# Altium PCB PCB1.PcbDoc
Units mm, origin at the board's own origin, x right, y up, seen from the top; angles counter-clockwise.
Board outline 51.75 x 40 mm, 4 copper layers (Component Side, Ground Plane, Power Plane, Solder Side), stack 0.844 mm thick; 26 components, 70 nets, 254 pads, 63 vias.
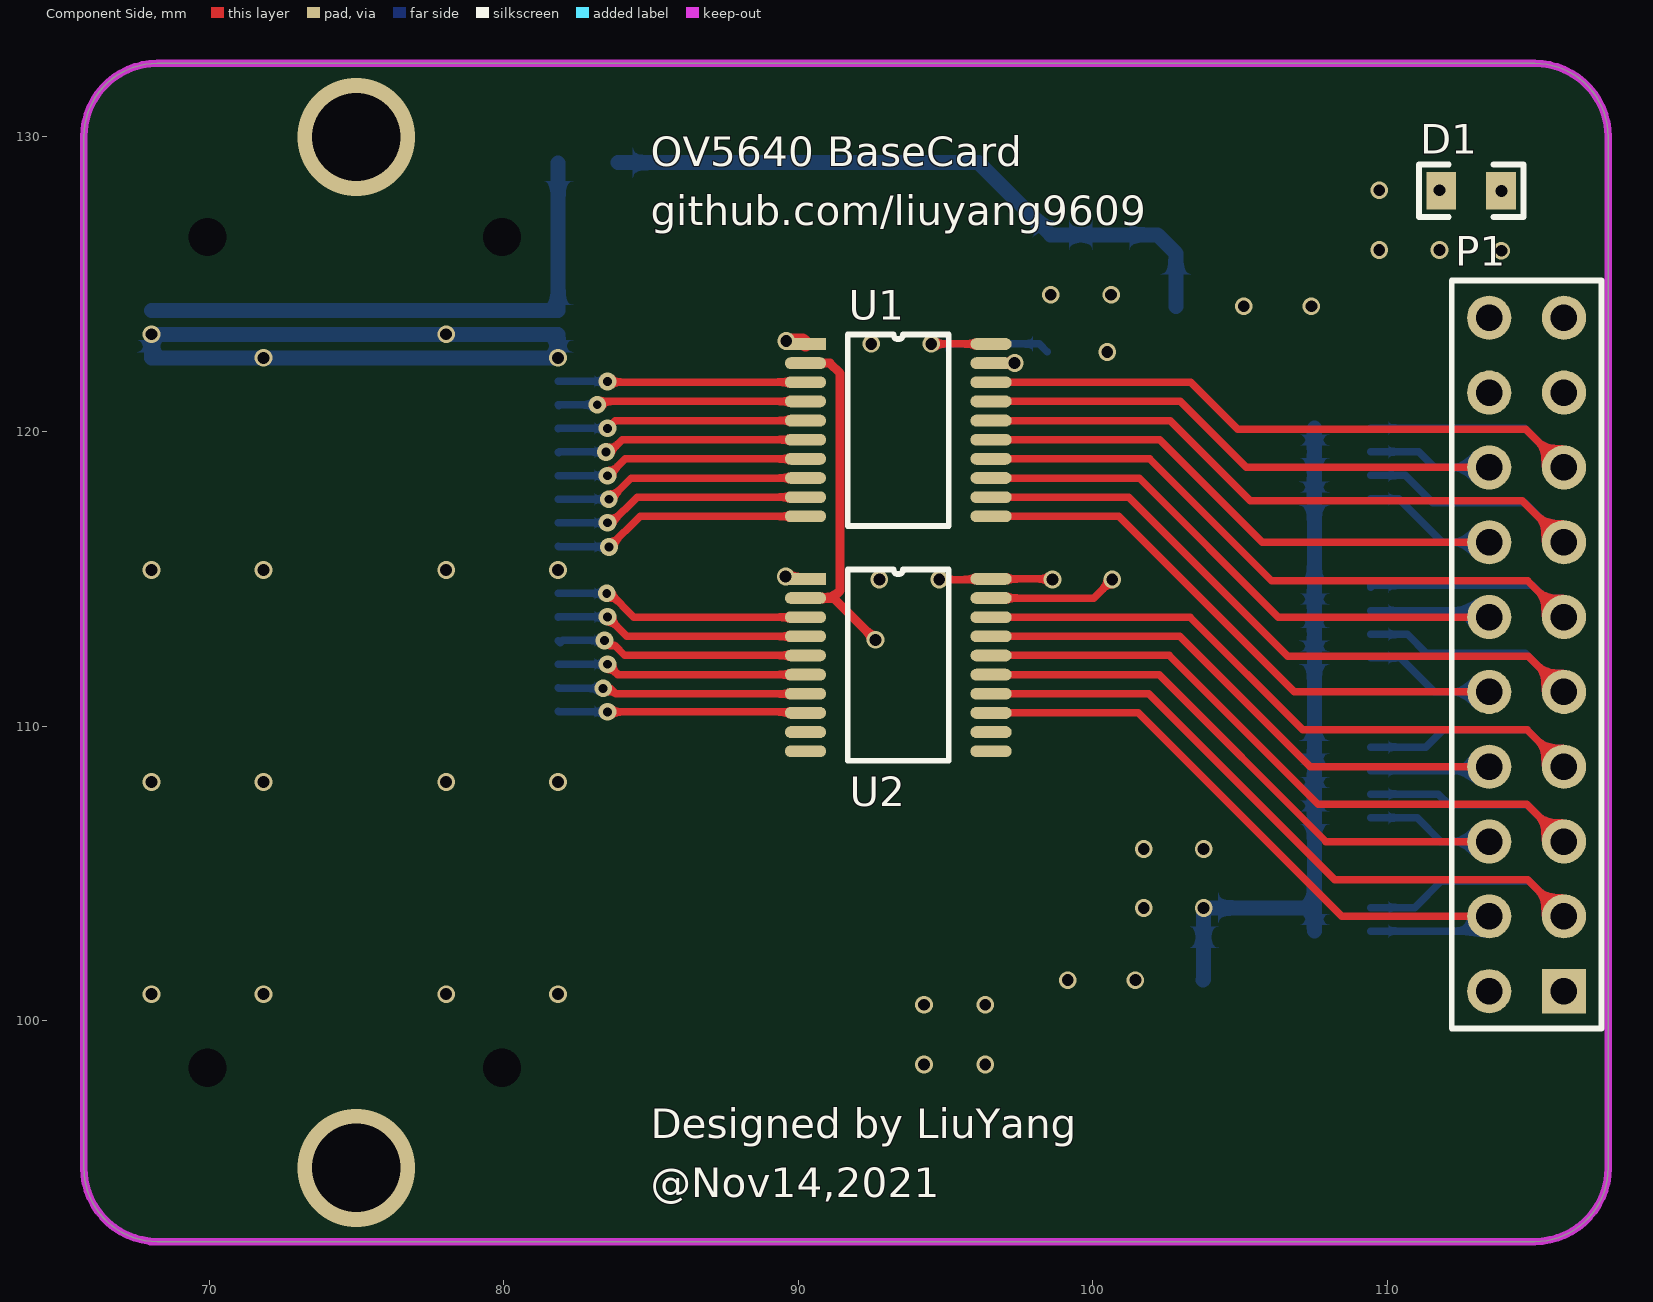
[diagram p0: Component Side view]
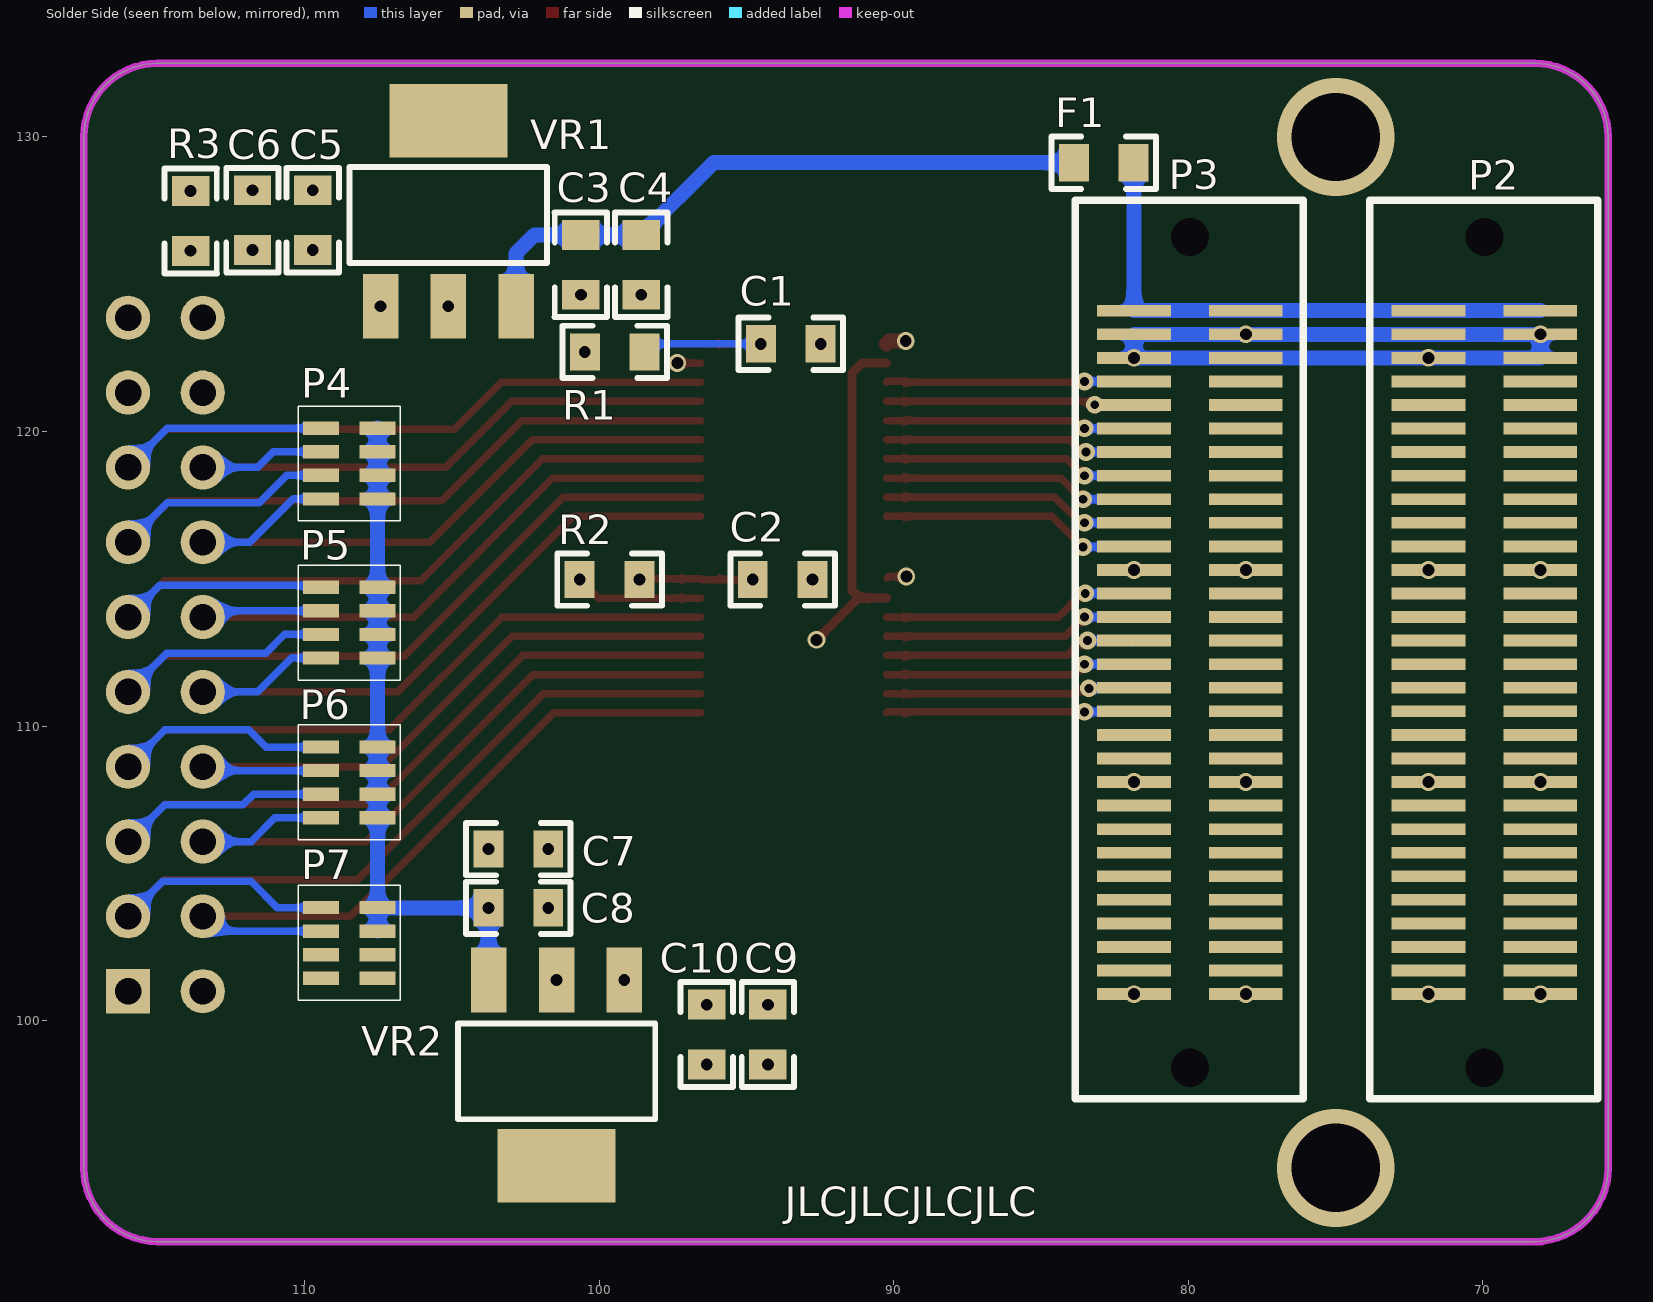
[diagram p1: Solder Side view, seen from below]
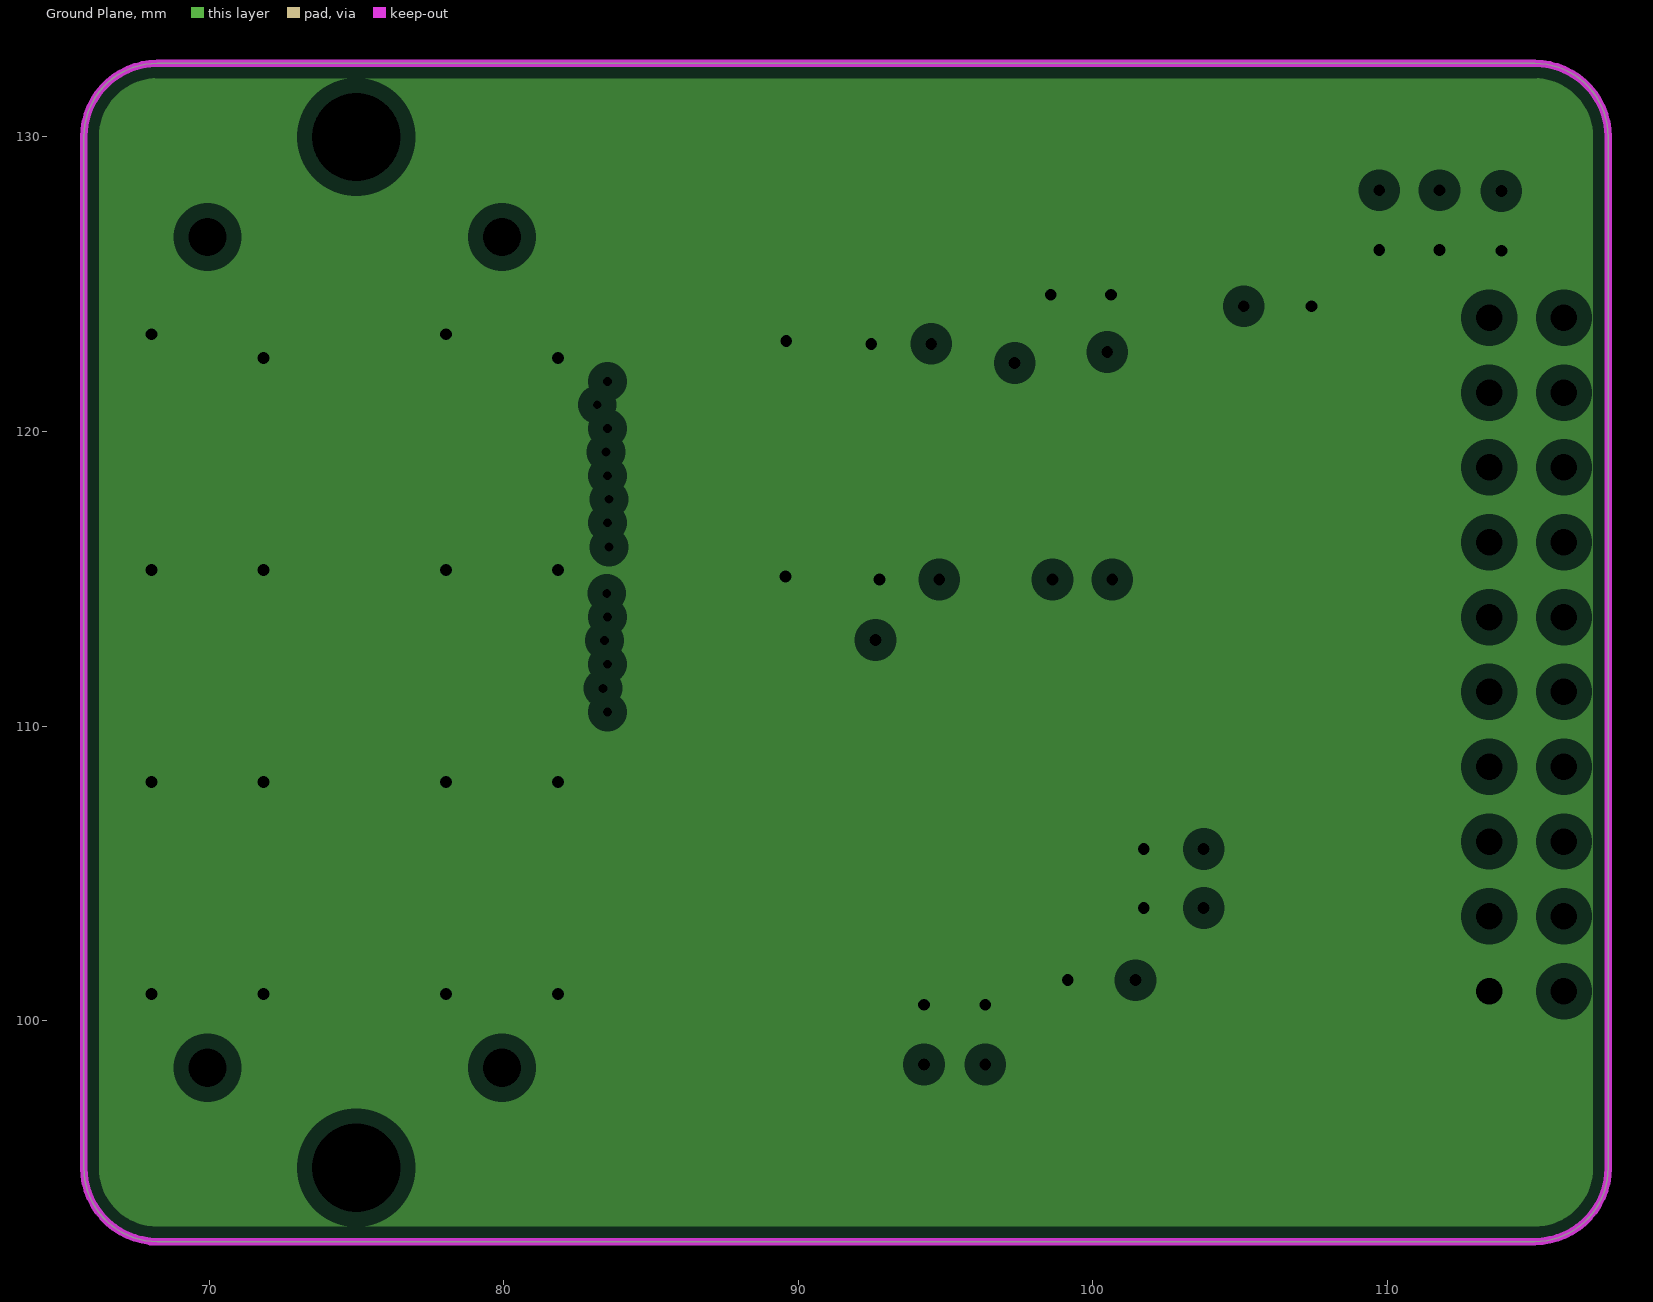
[diagram p2: Ground Plane, clearances drawn from the general rule]
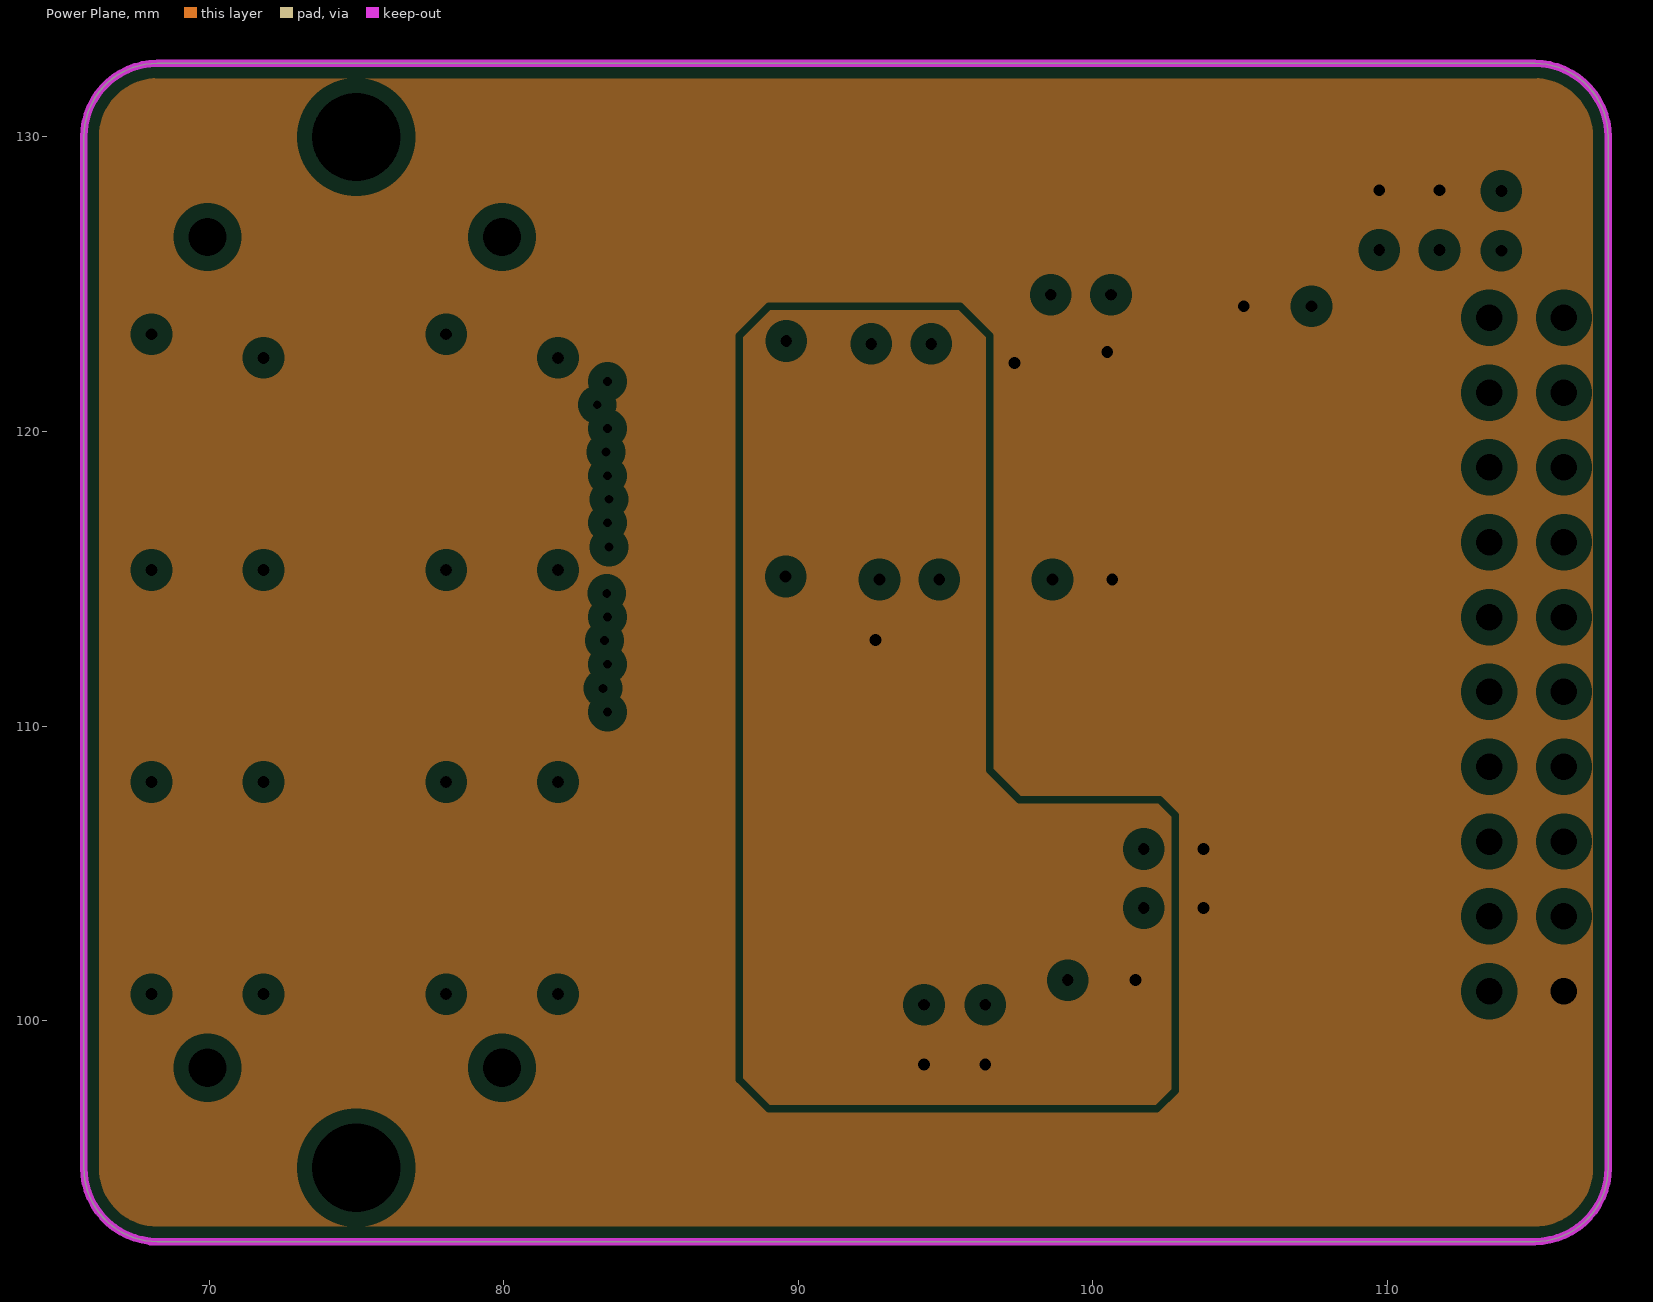
[diagram p3: Power Plane, clearances drawn from the general rule]
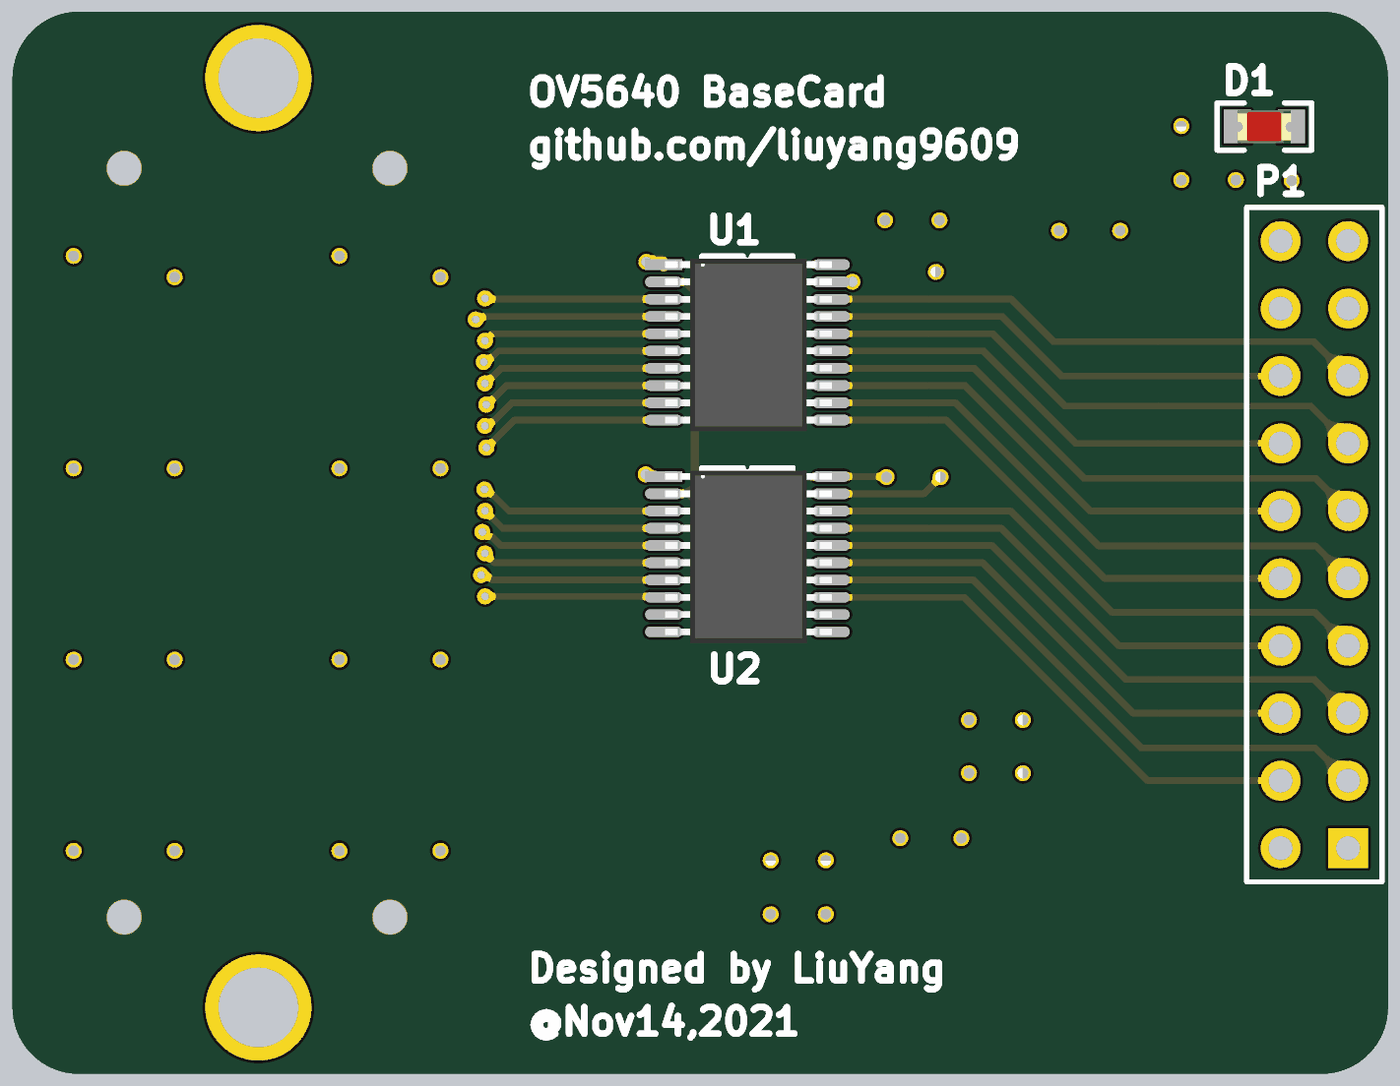
[diagram p4: 3D render of the assembled board from above, using the file's embedded part models]
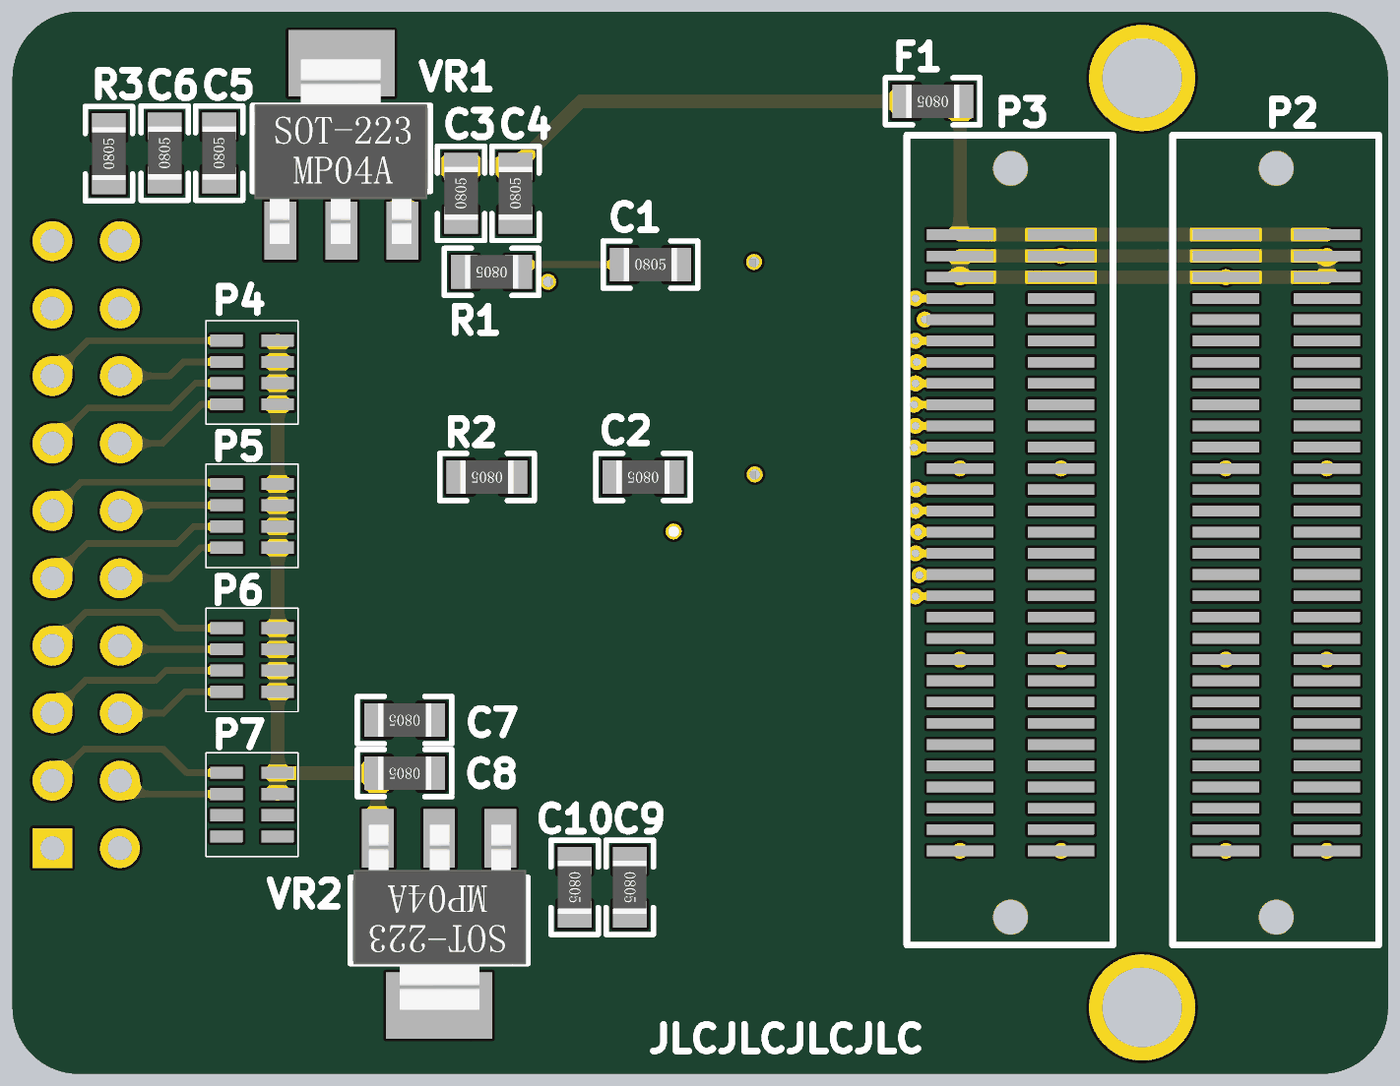
[diagram p5: 3D render of the assembled board from below, using the file's embedded part models]

## Layer stack, top to bottom
Top Solder: solder mask 0.0102, Solder Resist, Dk 3.5
Component Side: signal copper 0.0356
Dielectric 1: core 0.32, FR-4, Dk 4.8
Ground Plane: plane copper 0.036, net GND
Dielectric 3: prepreg 0.127, Dk 4.2
Power Plane: plane copper 0.036, net (Multiple Nets)
Dielectric 4: core 0.254, Dk 4.2
Solder Side: signal copper 0.0356
Bottom Solder: solder mask 0.0102, Solder Resist, Dk 3.5

## Board outline
68.25,92.5 cw(c68.25,95) 65.75,95 65.75,130 cw(c68.25,130) 68.25,132.5 115,132.5 cw(c115,130) 117.5,130 117.5,95 cw(c115,95) 115,92.5

## Design rules (kind name [scope] priority, off if disabled: settings)
Clearance [All] p1: gap=0.2
Length [InNetClass('Class1')] p1: maxlimit=11 minlimit=10
PlaneClearance [All] p1: clearance=0.508
PlaneConnect [All] p1: planeconnectstyle=Relief reliefexpansion=0.508 reliefentries=4 reliefconductorwidth=0.254 reliefairgap=0.254
PolygonConnect [All] p1: connectstyle=Relief reliefconductorwidth=0.254 reliefentries=4 polygonreliefangle="90 Angle" airgapwidth=0.254
RoutingVias [All] p1: holewidth=0.3 width=0.6 viastyle="Through Hole" minholewidth=0.3 minwidth=0.6 maxholewidth=0.711 maxwidth=1.27
SolderMaskExpansion [All] p1: expansion=0.102
Width [All] p1: maxlimit=200 minlimit=0.2 preferedwidth=0.254
28 further rules are at their usual default settings.

## Classes and differential pairs
net class "New Class": D0 D1 D2 D3 D4 D5 D6 D7 HS PCK SCK SDA VS XCK

## Components (designator, comment, footprint, x,y, rotation, side; value= is the part's Value field where it differs from the comment)
C1 "Cap" R0805 93.5,122.975 r180 bottom
C2 "Cap" R0805 93.775,114.975 r0 bottom
C3 "Cap" R0805 100.625,125.659 r90 bottom
C4 "Cap" R0805 98.575,125.659 r90 bottom
C5 "Cap" R0805 109.725,127.175 r90 bottom
C6 "Cap" R0805 111.775,127.175 r90 bottom
C7 "Cap" R0805 102.75,105.825 r0 bottom
C8 "Cap" R0805 102.75,103.825 r0 bottom
C9 "Cap" R0805 94.275,99.525 r270 bottom
C10 "Cap" R0805 96.35,99.525 r270 bottom
D1 "LED0" LED0805红 112.85,128.175 r0 top
F1 "Fuse 1" R0805 82.875,129.125 r0 bottom
P1 "OV5640" HDR2X10 116,101 r90 top locked
P2 "BTB" BTBCON_0.8mm_60P 71.85,124.1 r180 bottom locked
P3 "BTB" BTBCON_0.8mm_60P 81.85,124.1 r180 bottom locked
P4 "Res 10K" 排阻(4位贴片) 107.575,117.725 r0 bottom
P5 "Res 10K" 排阻(4位贴片) 107.575,112.325 r0 bottom
P6 "Res 10K" 排阻(4位贴片) 107.575,106.9 r0 bottom
P7 "Res 10K" 排阻(4位贴片) 107.575,101.45 r0 bottom
R1 "Res Semi" R0805 99.475,122.7 r0 bottom
R2 "Res Semi" R0805 99.65,114.975 r0 bottom
R3 "Res1" R0805 113.875,127.15 r90 bottom
U1 "LSF0108" "TSSOP20 74lvc245" 93.425,120.05 r0 top
U2 "LSF0108" "TSSOP20 74lvc245" 93.425,112.075 r0 top
VR1 "AMS1117-3V3" SOT-223 105.125,127.35 r180 bottom
VR2 "AMS1117-1V8" SOT-223 101.45,98.275 r0 bottom

## Footprints (in the part's own frame and the unit in brackets; to place one, negate y for a bottom-side part, rotate by r counter-clockwise, add the part's x,y. Pads: shape width x height; smd on the part's side, far side on the other; paste and mask are expansions set on the pad)
BTBCON_0.8mm_60P [mm]
  rect 2.5x0.4 smd: 1(0,0) 2(3.8,0) 3(0,-0.8) 4(3.8,-0.8) 5(0,-1.6) 6(3.8,-1.6) 7(0,-2.4) 8(3.8,-2.4) 9(0,-3.2) 10(3.8,-3.2) 11(0,-4) 12(3.8,-4) 13(0,-4.8) 14(3.8,-4.8) 15(0,-5.6) 16(3.8,-5.6) 17(0,-6.4) 18(3.8,-6.4) 19(0,-7.2) 20(3.8,-7.2) 21(0,-8) 22(3.8,-8) 23(0,-8.8) 24(3.8,-8.8) 25(0,-9.6) 26(3.8,-9.6) 27(0,-10.4) 28(3.8,-10.4) 29(0,-11.2) 30(3.8,-11.2) 31(0,-12) 32(3.8,-12) 33(0,-12.8) 34(3.8,-12.8) 35(0,-13.6) 36(3.8,-13.6) 37(0,-14.4) 38(3.8,-14.4) 39(0,-15.2) 40(3.8,-15.2) 41(0,-16) 42(3.8,-16) 43(0,-16.8) 44(3.8,-16.8) 45(0,-17.6) 46(3.8,-17.6) 47(0,-18.4) 48(3.8,-18.4) 49(0,-19.2) 50(3.8,-19.2) 51(0,-20) 52(3.8,-20) 53(0,-20.8) 54(3.8,-20.8) 55(0,-21.6) 56(3.8,-21.6) 57(0,-22.4) 58(3.8,-22.4) 59(0,-23.2) 60(3.8,-23.2)
  round 1 hole 1.3: 61(1.9,2.5) 62(1.9,-25.7)
  silkscreen extent -2,-26.75 5.75,3.75
HDR2X10 [mm] "Connector; Header; 10x2 Position"
  rect 1.5x1.5 hole 0.9: 1(0,0)
  round 1.5 hole 0.9: 2(0,2.54) 3(2.54,0) 4(2.54,2.54) 5(5.08,0) 6(5.08,2.54) 7(7.62,0) 8(7.62,2.54) 9(10.16,0) 10(10.16,2.54) 11(12.7,0) 12(12.7,2.54) 13(15.24,0) 14(15.24,2.54) 15(17.78,0) 16(17.78,2.54) 17(20.32,0) 18(20.32,2.54) 19(22.86,0) 20(22.86,2.54)
  silkscreen extent -1.27,-1.27 24.13,3.81
LED0805红 [mil]
  rect 40x50 smd: 1(-40,0) 2(40,0)
  silkscreen extent -70,-35 70,35, body extent -40,-25 40,24, height 43
R0805 [mil]
  rect 40x50 smd: 1(-40,0) 2(40,0)
  silkscreen extent -70,-35 70,35, body extent -39,-25 39,25, height 22
SOT-223 [mm]
  rect 1.2x2.2 smd: 1(-2.3,-3.1) 2(0,-3.1) 3(2.3,-3.1)
  rect 4x2.5 smd: 4(0,3.2)
  silkscreen extent -3.35,-1.62 3.35,1.62, body extent -3.28,-3.61 3.22,3.35, height 1.7
"TSSOP20 74lvc245" [mm]
  rect 1.4x0.4 smd: 1(-3.175,2.921)
  oval 1.4x0.4 smd: 2(-3.175,2.271) 3(-3.175,1.621) 4(-3.175,0.971) 5(-3.175,0.321) 6(-3.175,-0.329) 7(-3.175,-0.979) 8(-3.175,-1.629) 9(-3.175,-2.279) 10(-3.175,-2.929) 11(3.125,-2.929) 12(3.125,-2.279) 13(3.125,-1.629) 14(3.125,-0.979) 15(3.125,-0.329) 16(3.125,0.321) 17(3.125,0.971) 18(3.125,1.621) 19(3.125,2.271) 20(3.125,2.921)
  silkscreen extent -1.74,-3.25 1.69,3.25, body extent -3.12,-3.35 3.16,3.15, height 1.1
排阻(4位贴片) [mm]
  rect 1.22x0.45 smd: 1(-0.051,0.013) 2(1.869,0.013) 3(-0.051,-0.787) 4(1.869,-0.787) 5(-0.051,-1.587) 6(1.869,-1.587) 7(-0.051,-2.387) 8(1.869,-2.387)
  silkscreen extent -0.81,-3.14 2.64,0.76, body extent 0.1,-2.79 1.7,0.41, height 0.59

## Part data
C1 C2 C3 C4 C5 C6 C7 C8 C9 C10: "Capacitor"
D1: "Typical INFRARED GaAs LED"
F1: "Fuse"
P1: library part "Header 10X2", "Header, 10-Pin, Dual row"
P2 P3: library part "Header 30X2", "Header, 30-Pin, Dual row"
P4 P5 P6 P7: library part "Header 4X2", "Header, 4-Pin, Dual row"
R1 R2: "Semiconductor Resistor"
R3: "Resistor"
VR1 VR2: library part "Volt Reg", "Voltage Regulator"

## Via types
v1: diameter 0.6, hole 0.4, Component Side to Solder Side, 47 vias
v2: diameter 0.6, hole 0.3, Component Side to Solder Side, 14 vias
v3: diameter 4, hole 3, Component Side to Solder Side, 2 vias

## Nets (pads, with @x,y where several pads share a name; then routed paths per layer and width w, separated by ;. In a path a pad name is that pad's centre, name@x,y a point inside that pad or via, vN(x,y) a via of type N, cw(c..) or ccw(c..) an arc to the next point about the centre after c; other vN are vias at no path point)
1V8: C9.2 C10.2 U1.2 U2.2 VR2.2 | length 12
  Component Side w0.305: U2.2 91.171,114.346 ; U1.2 91.079,122.321 91.425,121.975 91.425,114.6 91.171,114.346 ; v1(92.625,112.925) 91.204,114.346 91.171,114.346
  other v1: 94.275,98.509 96.35,98.509 101.45,101.375
3V3: C5.2 C6.2 C7.2 C8.2 D1.1 P1.1 P4.1 P4.3 P4.5 P4.7 P5.1 P5.3 P5.5 P5.7 P6.1 P6.3 P6.5 P6.7 P7.5 P7.7 R1.2 R2.2 U1.19 U2.19 VR1.2 VR2.3 | length 28.4
  Component Side w0.254: U2.19 100.037,114.346 v1(100.666,114.975) ; U1.19 v1@97.346,122.321
  Solder Side w0.508: VR2.3 103.766,101.391 v1(103.766,103.825) P7.7@107.512,103.825 ; P7.5 P7.7 P6.1 P6.3 P6.5 P6.7 P5.1 P5.3 P5.5 P5.7 P4.1 P4.3 P4.5 P4.7
  other v1: 103.766,105.825 97.35,122.325 100.491,122.7 105.125,124.25 109.725,128.191 111.775,128.191
5V: F1.1 P2.1 P2.2 P3.1 P3.2 | length 18.8
  Solder Side w0.305: F1.1@81.85,129.116 F1.1
  Solder Side w0.508: P2.2 P2.1 P3.2 P3.1 F1.1@81.85,129.116
A12: P3.46
A13: P3.44
A14: P3.39
A15: P3.37
A16: P3.18
A17: P3.16
B13: P3.45
B14: P3.43
B15: P3.36
B16: P3.34
C12: P3.40
C13: P3.38
C16: P3.32
C17: P3.28
D0: P1.16 P4.6 U1.17 | length 22.1
  Component Side w0.254: U1.17 102.979,121.021 105.22,118.78 P1.16
  Solder Side w0.254: P4.6 111.063,119.312 111.595,118.78 P1.16
D1: P1.15 P4.8 U1.18 | length 27.8
  Component Side w0.254: U1.18 103.329,121.671 104.925,120.075 114.705,120.075 P1.15
  Solder Side w0.254: P4.8 114.668,120.112 P1.15
D2: P1.14 P4.2 U1.15 | length 23
  Component Side w0.254: U1.15 102.279,119.721 105.76,116.24 P1.14
  Solder Side w0.254: P4.2 110.388,117.712 111.86,116.24 P1.14
D3: P1.13 P4.4 U1.16 | length 28.7
  Component Side w0.254: U1.16 102.629,120.371 105.35,117.65 114.59,117.65 P1.13
  Solder Side w0.254: P4.4 110.613,118.512 111.55,117.575 114.665,117.575 P1.13
D4: P1.12 P5.6 U1.13 | length 23
  Component Side w0.254: U1.13 101.579,118.421 106.3,113.7 P1.12
  Solder Side w0.254: P5.6 113.248,113.912 P1.12
D5: P1.11 P5.8 U1.14 | length 28.7
  Component Side w0.254: U1.14 101.929,119.071 106.075,114.925 114.775,114.925 P1.11
  Solder Side w0.254: P5.8 109.444,114.777 114.923,114.777 P1.11
D6: P1.10 P5.2 U1.11 | length 23.9
  Component Side w0.254: U1.11 100.879,117.121 106.84,111.16 P1.10
  Solder Side w0.254: P5.2 110.438,112.312 111.59,111.16 P1.10
D7: P1.9 P5.4 U1.12 | length 29.6
  Component Side w0.254: U1.12 101.229,117.771 106.625,112.375 114.785,112.375 P1.9
  Solder Side w0.254: P5.4 110.688,113.112 111.325,112.475 114.685,112.475 P1.9
D14: P3.50
D15: P3.48
D16: P3.30
D17: P3.26
E14: P3.31 U2.6 | length 8.5
  Component Side w0.254: v2(83.527,112.1) 83.881,111.746 U2.6
  Solder Side w0.254: P3.31 v2(83.527,112.1)
E15: P3.29 U2.5 | length 8.7
  Component Side w0.254: v2(83.429,112.906) 83.608,112.727 83.787,112.727 84.118,112.396 U2.5
  Solder Side w0.254: P3.29 81.925,112.825 82.005,112.906 v2(83.429,112.906)
E17: P3.14
E18: P3.12
F13: P3.54
F15: P3.22
F16: P3.35 U2.8 | length 8.4
  Component Side w0.254: v2(83.529,110.48) 90.216,110.48 U2.8
  Solder Side w0.254: P3.35 81.87,110.48 v2(83.529,110.48)
F17: P3.33 U2.7 | length 8.5
  Component Side w0.254: v2(83.379,111.28) 83.616,111.28 83.8,111.096 U2.7
  Solder Side w0.254: P3.33 81.855,111.305 81.88,111.28 v2(83.379,111.28)
F18: P3.13 U1.6 | length 8.6
  Component Side w0.254: v2(83.479,119.306) 83.616,119.306 84.031,119.721 U1.6
  Solder Side w0.254: P3.13 81.869,119.281 81.894,119.306 v2(83.479,119.306)
G14: P3.52
G15: P3.20
G16: P3.10
G18: P3.11 U1.5 | length 8.5
  Component Side w0.254: v2(83.529,120.106) 83.794,120.371 U1.5
  Solder Side w0.254: P3.11 81.856,120.106 v2(83.529,120.106)
G19: P3.9 U1.4 | length 8.5
  Component Side w0.254: v2(83.179,120.906) 83.294,121.021 U1.4
  Solder Side w0.254: P3.9 81.875,120.875 81.906,120.906 v2(83.179,120.906)
GND: C1.2 C2.1 C3.1 C4.1 C5.1 C6.1 C7.1 C8.1 C9.1 C10.1 P1.2 P2.3 P2.4 P2.5 P2.6 P2.23 P2.24 P2.41 P2.42 P2.59 P2.60 P3.3 P3.4 P3.5 P3.6 P3.23 P3.24 P3.41 P3.42 P3.59 P3.60 R3.1 U1.1 U2.1 VR1.1 VR2.1 | length 30.4
  Component Side w0.254: v1(89.575,115.075) 90.171,115.075 U2.1@90.225,115.021
  Component Side w0.508: v1(89.6,123.075) 90.15,123.075 U1.1@90.25,122.975
  Solder Side w0.508: P2.4@68.05,123.175 P2.6 v1(71.85,122.5) P3.6 v1(81.85,122.5) P3.3 v1(78.05,123.3) P2.3 v1(68.05,123.3)
  other v1: 94.275,100.541 96.35,100.541 68.05,100.9 71.85,100.9 78.05,100.9 81.85,100.9 99.15,101.375 101.734,103.825 101.734,105.825 68.05,108.1 71.85,108.1 78.05,108.1 81.85,108.1 92.759,114.975 68.05,115.3 71.85,115.3 78.05,115.3 81.85,115.3 92.484,122.975 107.425,124.25 98.575,124.643 100.625,124.643 113.875,126.134 109.725,126.159 111.775,126.159
H16: P3.8
H17: P3.21 U1.10 | length 8.8
  Component Side w0.254: v2(83.579,116.081) 83.594,116.081 84.635,117.121 U1.10
  Solder Side w0.254: P3.21 81.869,116.081 v2(83.579,116.081)
H18: P3.19 U1.9 | length 8.8
  Component Side w0.254: v2(83.527,116.9) 83.662,116.9 84.533,117.771 U1.9
  Solder Side w0.254: P3.19 v2(83.527,116.9)
H19: P3.7 U1.3 | length 8.4
  Component Side w0.254: v2(83.527,121.7) 83.554,121.673 89.56,121.673 89.587,121.7 90.221,121.7 U1.3
  Solder Side w0.254: P3.7 v2(83.527,121.7)
HS: P1.6 P6.2 U2.15 | length 23.6
  Component Side w0.254: U2.15 102.254,111.746 107.92,106.08 P1.6
  Solder Side w0.254: P6.2 111.013,106.887 111.82,106.08 P1.6
J15: P3.58
J16: P3.56
J17: P3.17 U1.8 | length 8.7
  Component Side w0.254: v2(83.575,117.7) 83.614,117.7 84.335,118.421 U1.8
  Solder Side w0.254: P3.17 v2(83.575,117.7)
K15: P3.57
K17: P3.15 U1.7 | length 8.6
  Component Side w0.254: v2(83.527,118.5) 83.56,118.5 84.131,119.071 U1.7
  Solder Side w0.254: P3.15 v2(83.527,118.5)
K18: P3.53
K19: P3.51
K20: P3.49
L15: P3.55
L16: P3.27 U2.4 | length 8.7
  Component Side w0.254: v2(83.529,113.706) 84.189,113.046 U2.4
  Solder Side w0.254: P3.27 81.856,113.706 v2(83.529,113.706)
L17: P3.25 U2.3 | length 8.7
  Component Side w0.254: v2(83.504,114.506) 83.616,114.506 84.425,113.696 U2.3
  Solder Side w0.254: P3.25 81.856,114.506 v2(83.504,114.506)
L20: P3.47
NetC1_1: C1.1 R1.1 U1.20 | length 6.1
  Component Side w0.254: v1(94.516,122.975) 96.546,122.975 U1.20
  Solder Side w0.254: v1(94.516,122.975) 98.184,122.975 R1.1
NetC2_2: C2.2 R2.1 U2.20 | length 3.9
  Component Side w0.254: v1(94.791,114.975) 96.529,114.975 U2.20 98.613,114.996 v1(98.634,114.975)
NetC3_2: C3.2 C4.2 F1.2 VR1.3 | length 22
  Solder Side w0.508: F1.2 96.125,129.125 C4.2 C3.2 102.2,126.675 102.825,126.05 VR1.3
NetD1_2: D1.2 R3.2
  other v1: 113.875,128.166
PCK: P1.7 P6.8 U2.18 | length 28.9
  Component Side w0.254: U2.18 103.304,113.696 107.125,109.875 114.745,109.875 P1.7
  Solder Side w0.254: P6.8 111.312,109.287 111.9,109.875 114.745,109.875 P1.7
SCK: P1.3 P7.8 U2.14 | length 30
  Component Side w0.254: U2.14 101.904,111.096 108.225,104.775 114.765,104.775 P1.3
  Solder Side w0.254: P7.8 110.937,103.837 111.825,104.725 114.815,104.725 P1.3
SDA: P1.4 P7.6 U2.13 | length 24
  Component Side w0.254: U2.13 101.554,110.446 108.46,103.54 P1.4
  Solder Side w0.254: P7.6 112.957,103.037 P1.4
VS: P1.5 P6.4 U2.16 | length 29.3
  Component Side w0.254: U2.16 102.604,112.396 107.65,107.35 114.73,107.35 P1.5
  Solder Side w0.254: P6.4 111.738,107.687 112.1,107.325 114.755,107.325 P1.5
XCK: P1.8 P6.6 U2.17 | length 22.8
  Component Side w0.254: U2.17 102.954,113.046 107.38,108.62 P1.8
  Solder Side w0.254: P6.6 113.327,108.487 P1.8
pads on no net: P1.17 P1.18 P1.19 P1.20 P2.7 P2.8 P2.9 P2.10 P2.11 P2.12 P2.13 P2.14 P2.15 P2.16 P2.17 P2.18 P2.19 P2.20 P2.21 P2.22 P2.25 P2.26 P2.27 P2.28 P2.29 P2.30 P2.31 P2.32 P2.33 P2.34 P2.35 P2.36 P2.37 P2.38 P2.39 P2.40 P2.43 P2.44 P2.45 P2.46 P2.47 P2.48 P2.49 P2.50 P2.51 P2.52 P2.53 P2.54 P2.55 P2.56 P2.57 P2.58 P2.61 P2.62 P3.61 P3.62 P7.1 P7.2 P7.3 P7.4 U2.9 U2.10 U2.11 U2.12 VR1.4 VR2.4
copper on no net:
  other v3: 75,95 75,130

## Polygon pours and split planes (outlines as drawn)
GND on Ground Plane (split plane): 115.195,131.982 115.389,131.954 115.578,131.906 115.762,131.84 115.939,131.757 116.107,131.656 116.264,131.54 116.408,131.408 116.54,131.264 116.656,131.107 116.757,130.939 116.84,130.762 116.906,130.578 116.954,130.389 116.982,130.195 116.991,130.016 116.99,130 116.99,95 116.991,94.984 116.982,94.805 116.954,94.611 116.906,94.422 116.84,94.238 116.757,94.061 116.656,93.893 116.54,93.736 116.408,93.592 116.264,93.46 116.107,93.344 115.939,93.243 115.762,93.16 115.578,93.094 115.389,93.046 115.195,93.018 115.016,93.009 115,93.01 68.25,93.01 68.234,93.009 68.055,93.018 67.861,93.046 67.672,93.094 67.488,93.16 67.311,93.243 67.143,93.344 66.986,93.46 66.842,93.592 66.71,93.736 66.594,93.893 66.493,94.061 66.41,94.238 66.344,94.422 66.296,94.611 66.268,94.805 66.259,94.984 66.26,95 66.26,130 66.259,130.016 66.268,130.195 66.296,130.389 66.344,130.578 66.41,130.762 66.493,130.939 66.594,131.107 66.71,131.264 66.842,131.408 66.986,131.54 67.143,131.656 67.311,131.757 67.488,131.84 67.672,131.906 67.861,131.954 68.055,131.982 68.234,131.991 68.25,131.99 115,131.99 115.016,131.991
1V8 on Power Plane (split plane): 96.371,123.196 96.371,108.5 96.38,108.45 96.408,108.408 97.408,107.408 97.45,107.38 97.5,107.371 102.221,107.371 102.671,106.921 102.671,97.9 102.671,97.679 102.121,97.129 89.054,97.129 88.129,98.054 88.129,123.196 89.054,124.121 95.446,124.121
3V3 on Power Plane (split plane): 115.195,131.982 115.389,131.954 115.578,131.906 115.762,131.84 115.939,131.757 116.107,131.656 116.264,131.54 116.408,131.408 116.54,131.264 116.656,131.107 116.757,130.939 116.84,130.762 116.906,130.578 116.954,130.389 116.982,130.195 116.991,130.016 116.99,130 116.99,95 116.991,94.984 116.982,94.805 116.954,94.611 116.906,94.422 116.84,94.238 116.757,94.061 116.656,93.893 116.54,93.736 116.408,93.592 116.264,93.46 116.107,93.344 115.939,93.243 115.762,93.16 115.578,93.094 115.389,93.046 115.195,93.018 115.016,93.009 115,93.01 68.25,93.01 68.234,93.009 68.055,93.018 67.861,93.046 67.672,93.094 67.488,93.16 67.311,93.243 67.143,93.344 66.986,93.46 66.842,93.592 66.71,93.736 66.594,93.893 66.493,94.061 66.41,94.238 66.344,94.422 66.296,94.611 66.268,94.805 66.259,94.984 66.26,95 66.26,130 66.259,130.016 66.268,130.195 66.296,130.389 66.344,130.578 66.41,130.762 66.493,130.939 66.594,131.107 66.71,131.264 66.842,131.408 66.986,131.54 67.143,131.656 67.311,131.757 67.488,131.84 67.672,131.906 67.861,131.954 68.055,131.982 68.234,131.991 68.25,131.99 115,131.99 115.016,131.991

## Keep-outs
Keep-Out Layer:
  lines w0.254: 68,92.5 115,92.5 ccw(c115,95) 117.5,95 117.5,130 ccw(c115,130) 115,132.5 68.25,132.5 ccw(c68.25,130) 65.75,130 65.75,95 ccw(c68.25,95) 68.25,92.5

## Other copper
Power Plane (plane layer: these items are gaps in the copper):
  lines w0.254: 93.25,97 101.35,97 102.175,97 102.8,97.625 102.8,97.9 102.8,106.975 102.275,107.5 101.8,107.5 97.5,107.5 96.5,108.5 96.5,123.25 95.5,124.25 89,124.25 88,123.25 88,98 89,97 93.5,97

## Silkscreen, mask and mechanical layers (free items; w line width, h text height)
Top Overlay:
  text "OV5640 BaseCard" at 85,129 h1
  text "github.com/liuyang9609" at 85,127 h1
  text "Designed by LiuYang" at 85,96 h1
  text "@Nov14,2021" at 85,94 h1
Bottom Overlay:
  text "JLCJLCJLCJLC" at 93.7,93.35 h1
Mechanical 1:
  lines w0.254: 65.75,95 ccw(c68.25,95) 68.25,92.5 93.75,92.5 115,92.5 ccw(c115,95) 117.5,95 117.5,130 ccw(c115,130) 115,132.5 94.75,132.5 68.25,132.5 ccw(c68.25,130) 65.75,130 65.75,95